# Altium PCB PCB2.PcbDoc (part 2 of 5)
Units mil, origin at the board's own origin, x right, y up, seen from the top; angles counter-clockwise.
Board outline 6000 x 4000 mil, 2 copper layers (Top Layer, Bottom Layer); 109 components, 117 nets, 490 pads, 96 vias.
Unrouted connection lines stored in the file: 3.
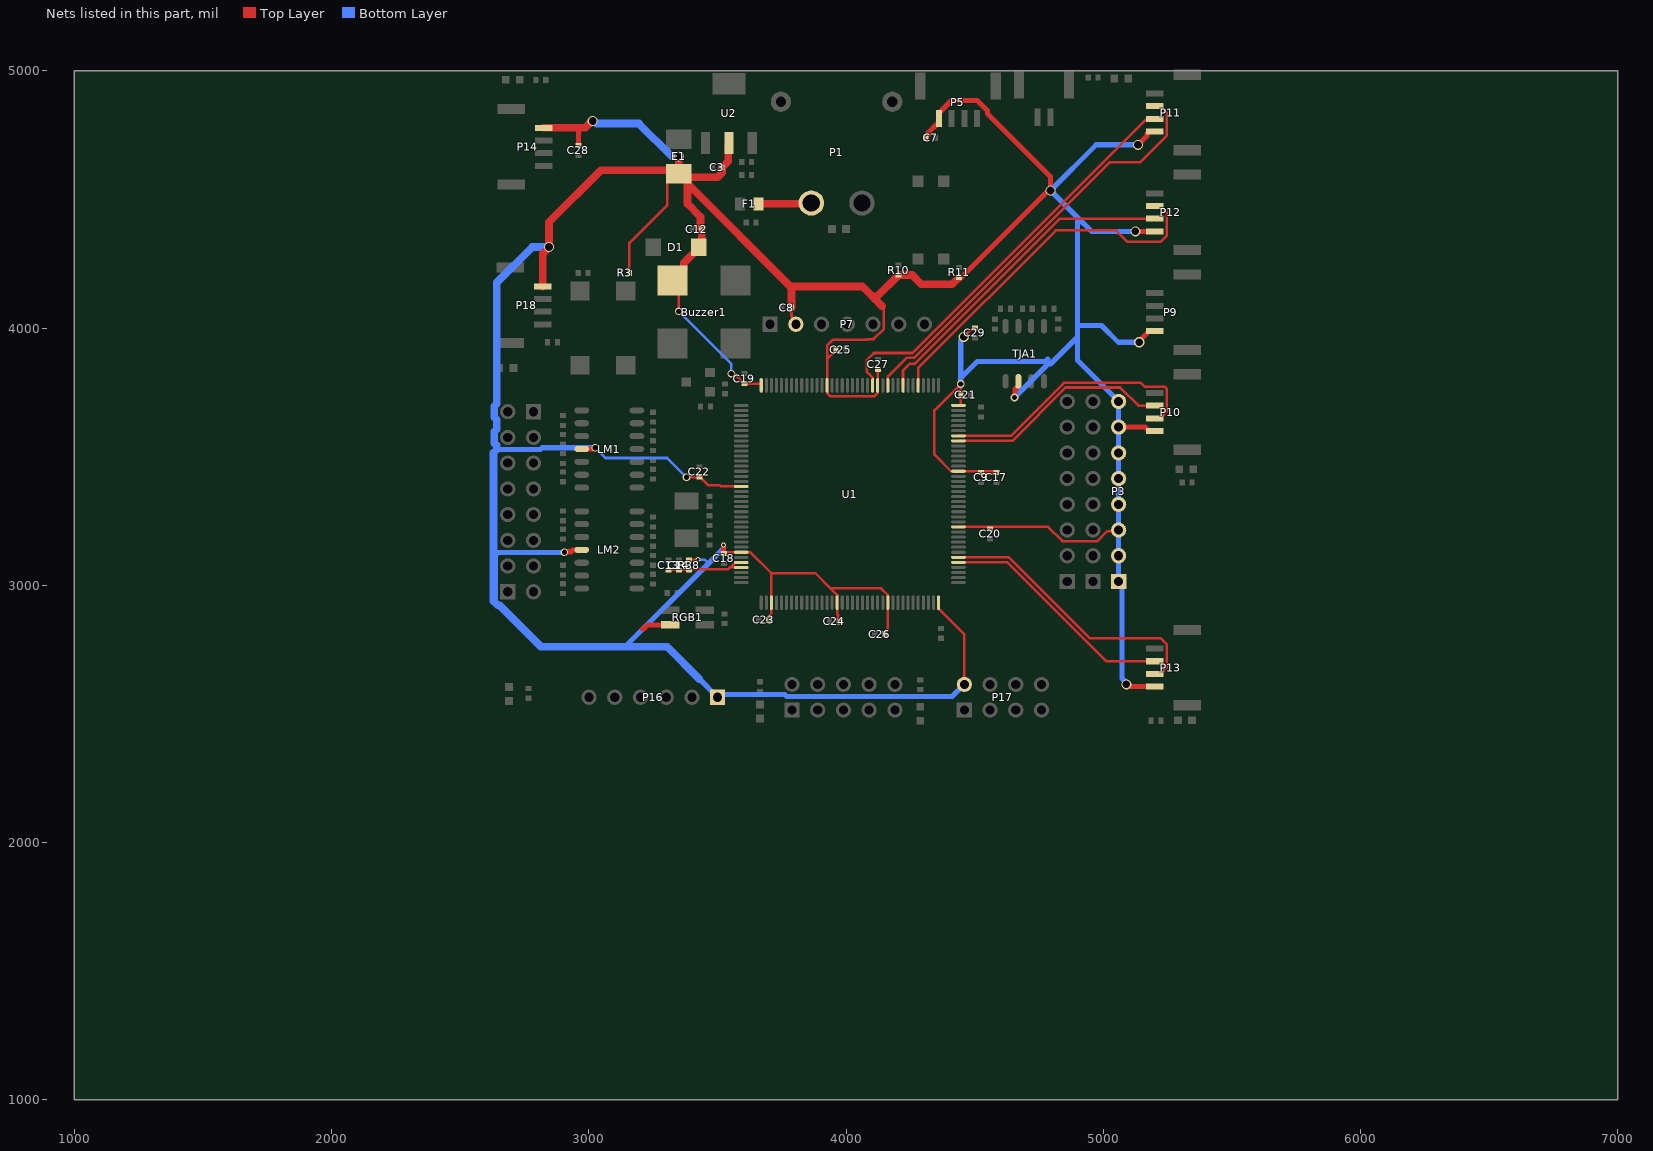
[diagram p2: the nets of this part, all layers, seen from the top]

## Via types
v1: diameter 19.68, hole 11.81, Top Layer to Bottom Layer, tented both sides, 64 vias
v2: diameter 39, hole 30, Top Layer to Bottom Layer, tented both sides, 17 vias
v3: diameter 30, hole 20, Top Layer to Bottom Layer, tented both sides, 15 vias

## Nets (pads, with @x,y where several pads share a name; then routed paths per layer and width w, separated by ;. In a path a pad name is that pad's centre, name@x,y a point inside that pad or via, vN(x,y) a via of type N, cw(c..) or ccw(c..) an arc to the next point about the centre after c; other vN are vias at no path point) (continued)
UART5_RX: P12.2 U1.116 | length 1280.6
  Top Layer w10: U1.116@4221.69,3777.24 4221.69,3835 4248.97,3862.27 4268.18,3862.27 4831.27,4425.35 P12.2@5200,4425.35
UART5_TX: P12.3 U1.113 | length 1452.9
  Top Layer w10: U1.113@4280.75,3777.24 4280.75,3845.04 4815.71,4380 5050,4380 5095,4335 5222.52,4335 5246.46,4358.95 5246.46,4449.76 5221.65,4474.57 P12.3@5200,4474.57 P12.3@5178.35,4474.57
USART1_RX: P10.2 U1.102 | length 1051.3
  Top Layer w10: U1.102@4437.24,3581.38 4640.78,3581.38 4846.58,3787.18 5146.42,3787.18 5161.15,3772.45 5238.85,3772.45 5246.46,3764.83 5246.46,3674.02 5221.65,3649.21 P10.2@5200,3649.21
USART1_TX: P10.3 U1.101 | length 878
  Top Layer w10: U1.101@4437.24,3561.69 4646.55,3561.69 4854.04,3769.18 5065.96,3769.18 5136.72,3698.43 P10.3@5200,3698.43
USART2_RX: P11.2 U1.122 | length 1616.2
  Top Layer w10: U1.122@4103.58,3777.24 4103.58,3807.58 4080,3831.16 4080,3875 4108.2,3903.2 4258.2,3903.2 5168.43,4813.43 P11.2@5200,4813.43
USART2_TX: P11.3 U1.119 | length 1653.2
  Top Layer w10: U1.119@4162.64,3777.24 4162.98,3777.59 4162.98,3811.94 4236.24,3885.2 4265.66,3885.2 5025.46,4645 5144.45,4645 5246.46,4747.02 5246.46,4837.83 5221.65,4862.64 P11.3@5200,4862.64
USART3_RX: P13.2 U1.78 | length 1096.6
  Top Layer w10: U1.78@4437.24,3108.94 4633,3108.94 4946.94,2795 5222.87,2795 5246.46,2771.41 5246.46,2680.6 5221.65,2655.79 P13.2@5200,2655.79
USART3_TX: P13.3 U1.77 | length 921.9
  Top Layer w10: U1.77@4437.24,3089.25 4627.23,3089.25 5011.49,2705 P13.3@5200,2705
VCC: Buzzer1.1 C3.1 C7.2 C8.2 C9.1 C12.2 C17.2 C18.2 C19.2 C20.2 C21.2 C22.2 C23.2 C24.2 C25.2 C26.2 C27.2 C28.2 C29.2 D1.1 E1.1 LM1.4 LM2.4 P3.1 P3.2 P3.3 P3.4 P3.5 P3.6 P3.7 P3.8 P5.4 P7.2 P9.1 P10.1 P11.1 P12.1 P13.1 P14.1 P16.1 P17.2 P18.1 R3.2 R10.2 R11.1 R38.1 RGB1.1 TJA1.2 U1.17 U1.30 U1.39 U1.52 U1.62 U1.72 U1.84 U1.95 U1.108 U1.121 U1.131 U1.144 U2.2 | length 20339.1
  Top Layer w10: R3.2@3158,4215 3158,4330.81 3305.79,4478.6 3305.79,4567.6 E1.1@3338.19,4600 ; Buzzer1.1@3325.3,4185 3350,4160.3 v3(3350,4065) ; v3(3380,3420) 3429.91,3420 3431.81,3421.9 3465.2,3388.5 3509.46,3388.5 3513.44,3384.53 U1.17@3592.76,3384.53 ; R38.1@3390,3098 3390.91,3098.91 3424.09,3098.91 v1(3425,3099.81) ; C18.2@3525,3124 3529.28,3128.28 3592.41,3128.28 U1.30@3592.76,3128.62 3593.1,3128.28 3628.56,3128.28 3709.88,3046.96 ; v3(3554,3823) 3564.8,3823 3603.64,3784.16 3670.51,3784.16 U1.144@3670.51,3777.24 ; C23.2@3699,2865.7 3704,2870.7 3704,2883.75 3709.54,2889.28 3709.54,2932.41 U1.39@3709.88,2932.76 3709.88,3046.96 ; C8.2@3788,4080 3788,4045.27 3805,4028.27 P7.2@3805,4015 ; C25.2@3961,3915.24 3961,3913.43 3926.76,3879.19 ; C24.2@3974,2860 3969,2865 3969,2886.42 3966.13,2889.28 3966.13,2944.31 3965.44,2945 3965.44,2962.79 3940,2988.23 ; C27.2@4125,3839.61 4123.61,3838.23 4123.61,3780.35 4123.27,3780 U1.121@4123.27,3777.24 4122.92,3776.9 4122.92,3747.21 4111.41,3735.7 3938.27,3735.7 3926.76,3747.21 3926.76,3776.9 U1.131@3926.42,3777.24 3926.76,3777.59 3926.76,3879.19 ; 4140,4085 4147.53,4077.47 4147.53,3997.38 4107.34,3957.2 4084.83,3957.2 4082.1,3954.47 3948.28,3954.47 3926.76,3932.96 3926.76,3879.19 ; C26.2@4150,2810.58 4150,2812.39 4162.64,2825.03 U1.62@4162.64,2932.76 4162.29,2933.1 4162.29,2962.79 4136.85,2988.23 3940,2988.23 ; U1.72@4359.49,2932.76 4359.49,2910.12 4460,2809.61 P17.2@4460,2615 ; U1.84@4437.24,3227.05 4785.94,3227.05 4840.86,3172.13 4977.28,3172.13 5015.47,3210.33 5055.33,3210.33 P3.3@5060,3215 ; U1.108@4437.24,3699.49 4446.16,3699.49 4447,3700.32 4446.16,3701.16 v3(4446.16,3783) 4343.19,3680.03 4343.19,3507.95 4407.21,3443.93 4436.9,3443.93 U1.95@4437.24,3443.58 4437.59,3443.24 4520.76,3443.24 C9.1@4525,3439 ; v2(4457.76,3965.94) 4486.82,3995 4495.89,3995 C29.2@4500.89,4000 ; 3709.88,3046.96 3881.28,3046.96 3940,2988.23
  Top Layer w20: v3(2905,3128.62) 2906.91,3130.54 2931.09,3130.54 2937.68,3137.12 2972.02,3137.12 LM2.4@2972.72,3137.81 ; 2950,4778.43 2960,4768.43 C28.2@2960,4710 ; LM1.4@2972.72,3530 2973.41,3530.69 3017.99,3530.69 3022.29,3535 v3(3025,3535) ; 3210,2830 3212.71,2830 3229.16,2846.46 RGB1.1@3317.21,2846.46 ; v1(3523.19,3157.5) 3523.19,3124 C18.2@3525,3124 ; C7.2@4310,4740 4310,4741.81 4320,4751.81 4320,4759.27 4352.27,4791.54 4359.76,4791.54 4361.57,4793.35 P5.4@4361.57,4815 4361.57,4836.65 4409.92,4885 4509.94,4885 4549.97,4844.97 4549.97,4833.37 4795,4588.35 v2(4795,4535) 4786.43,4535 R11.1@4441.62,4190.2 ; C9.1@4525,3439 C17.2@4585,3439 ; v3(4655,3730) 4656.91,3731.91 4656.91,3762.12 4670,3775.2 TJA1.2@4670,3792.92 ; P3.7@5060,3615 5163.35,3615 5178.35,3600 P10.1@5200,3600 ; v2(5090,2615) 5095.14,2615 5103.57,2606.57 P13.1@5200,2606.57 ; v2(5125,4376.14) P12.1@5200,4376.14 ; v2(5135,4712.56) 5170,4747.56 5170,4755.87 5178.35,4764.21 P11.1@5200,4764.21 ; v2@5140,3954.4 5144.67,3954.4 5178.35,3988.07 P9.1@5200,3988.07
  Top Layer w30: P18.1@2820.98,4162.17 2820.98,4288.55 2845,4312.56 v2(2845,4315) 2845,4411 3047.43,4613.43 3338.19,4613.43 E1.1@3350,4613.43 ; P14.1@2825,4778.43 2950,4778.43 2985.99,4778.43 3012.56,4805 v2(3015,4805) ; Buzzer1.1@3325.3,4185 3369.36,4229.06 3369.36,4253.17 3427.17,4310.98 D1.1@3427.17,4315 3439,4326.83 C12.2@3439,4385.06 3434,4390.06 3434,4433.09 3384.21,4482.88 3384.21,4560.79 ; v2(3350,4667.72) E1.1@3350,4613.43 ; U2.2@3545,4719.65 3542.28,4716.93 3542.28,4649.28 C3.1@3518,4625 3518,4604.57 3500.43,4587 E1.1@3374.81,4587 ; C8.2@3788,4080 3788,4157 3384.21,4560.79 ; 3788,4162 4063,4162 4101.5,4123.5 ; 4140,4085 4111.58,4113.42 4101.5,4123.5 ; R11.1@4439.8,4197.64 4412.81,4170.65 4293.27,4170.65 4257.27,4206.64 R10.2@4204.8,4206.64 4121.66,4123.5 4101.5,4123.5 ; E1.1@3350,4613.43 E1.1@3350,4600 3361.81,4600 E1.1@3374.81,4587 ; E1.1@3374.81,4587 3384.21,4577.6 3384.21,4560.79
  Bottom Layer w10: v3(3025,3535) 3065,3495 3305,3495 v3(3380,3420) ; v3(3350,4065) 3554,3861 v3(3554,3823) ; v1(3425,3099.81) 3450.19,3099.81 3465,3085
  Bottom Layer w20: 2630,3515 2642.47,3527.47 2811.15,3527.47 2818.67,3535 v3(3025,3535) ; 2637.47,2938.02 2637.47,3117.42 2647.53,3127.47 2903.85,3127.47 v3(2905,3128.62) ; 3140,2761.27 3141.27,2761.27 3465,3085 3523.19,3143.19 v1(3523.19,3157.5) ; 3430,2636 P16.1@3501,2565 3511,2575 3762.79,2575 3770.31,2567.47 4412.47,2567.47 P17.2@4460,2615 ; v3(4446.16,3783) 4446.16,3949.2 4457.76,3960.8 v2(4457.76,3965.94) ; 4455,3815 4510,3870 4775,3870 4785,3880 ; v3(4655,3730) 4785,3860 4795,3860 4900,3965 ; v2(5090,2615) 5090,2620.14 5072.5,2637.64 5072.5,3002.5 P3.1@5060,3015 P3.2@5060,3115 P3.3@5060,3215 P3.4@5060,3315 P3.5@5060,3415 P3.6@5060,3515 P3.7@5060,3615 P3.8@5060,3715 4900,3875 4900,3965 ; v2(5125,4376.14) 4953.86,4376.14 4900,4430 ; v2(5135,4712.56) 4972.56,4712.56 v2(4795,4535) 4900,4430 ; v2(5140,3945) 5058.67,3945 4993.67,4010 4905,4010 4900,4015 ; 4900,3965 4900,4015 ; 4900,4015 4900,4430
  Bottom Layer w30: 2630,3515 2630,3117.42 2630,2938.42 2645.95,2922.47 2653.02,2922.47 2814.22,2761.27 3140,2761.27 ; 2642.47,3527.47 2642.47,3543.24 2632.47,3553.24 2632.47,3596.76 2642.47,3606.76 2642.47,3643.24 2632.47,3653.24 2632.47,3696.76 2642.47,3706.76 2642.47,4177.47 2780,4315 v2(2845,4315) ; v2@3021.5,4805 3031.5,4795 3195,4795 3322.28,4667.72 v2(3350,4667.72) ; 3141.27,2761.27 3304.73,2761.27 3430,2636
VCC_IN: F1.2 P1.1 | length 206.7
  Top Layer w30: F1.2@3659.85,4483.15 P1.1@3866.57,4483.15
VDDA: C13.2 C14.2 R38.2 U1.32 U1.33 | length 337.2
  Top Layer w10: C13.2@3310,3060 C14.2@3350,3060 R38.2@3390,3060 3393,3063 3542.2,3063 3548.76,3069.57 3550.43,3069.57 ; U1.33@3592.76,3069.57 3550.43,3069.57 ; U1.32@3592.76,3089.25 3570.12,3089.25 3550.43,3069.57
pads on no net: Buzzer1.3 Buzzer1.4 P1.0 P5.0 P9.0 P10.0 P11.0 P12.0 P13.0 P14.0 P15.0 P18.0 TJA1.5 U1.5 U1.6 U1.7 U1.8 U1.9 U1.12 U1.26 U1.27 U1.28 U1.29 U1.37 U1.44 U1.45 U1.49 U1.50 U1.53 U1.54 U1.55 U1.56 U1.57 U1.68 U1.79 U1.80 U1.87 U1.88 U1.93 U1.100 U1.110 U1.114 U1.115 U1.117 U1.118 U1.123 U1.124 U1.125 U1.126 U1.127 U1.134 U1.140 U1.141 U1.142 U2.4
copper on no net: | length 205688.3